# EAGLE board ESP-01 Miner (EAGLE 9.6.2)
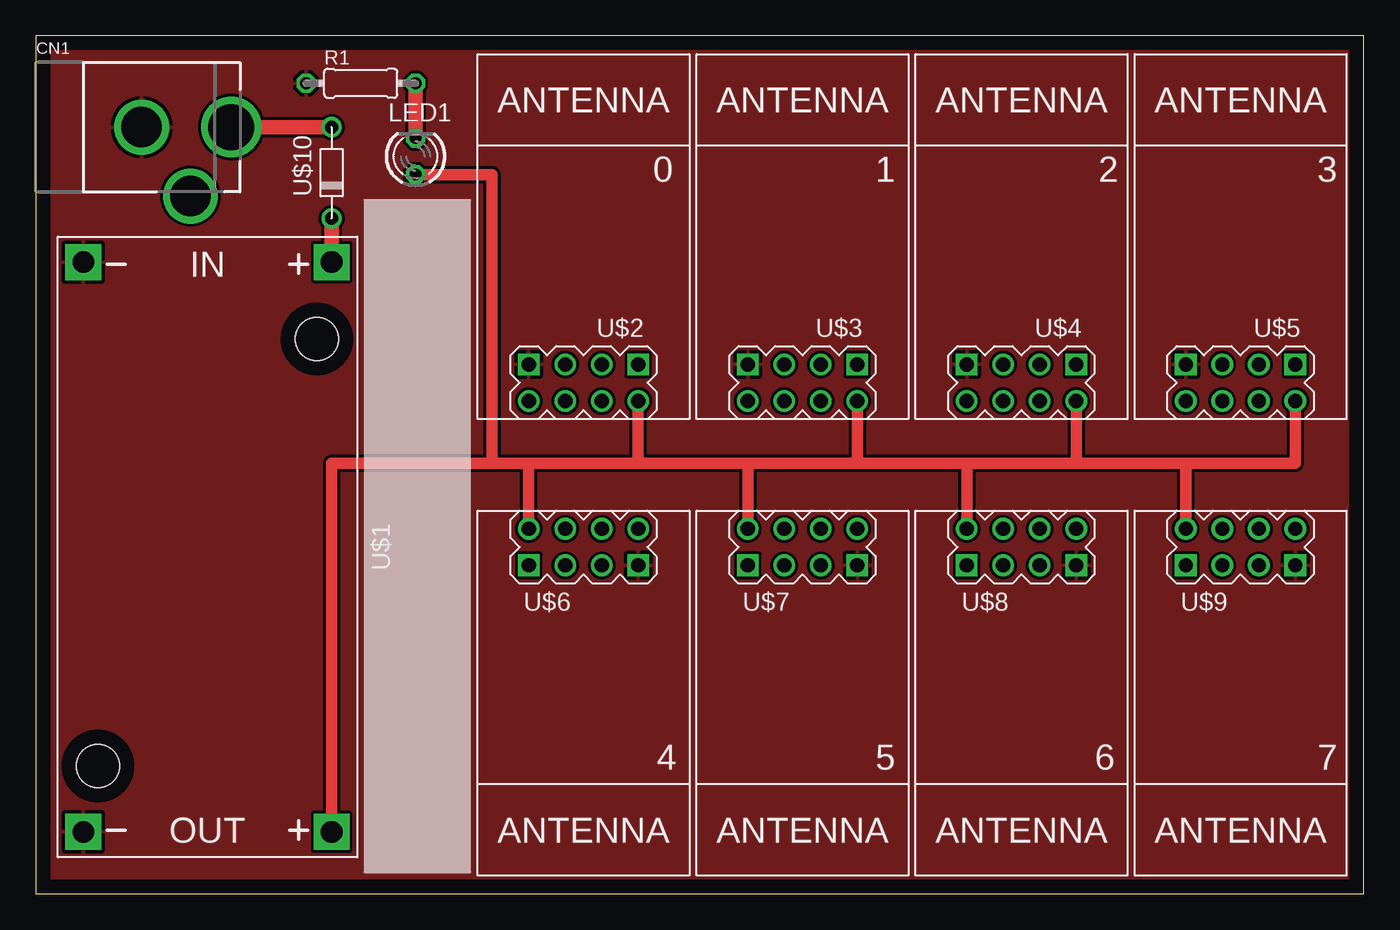
[diagram p0: board, top side]
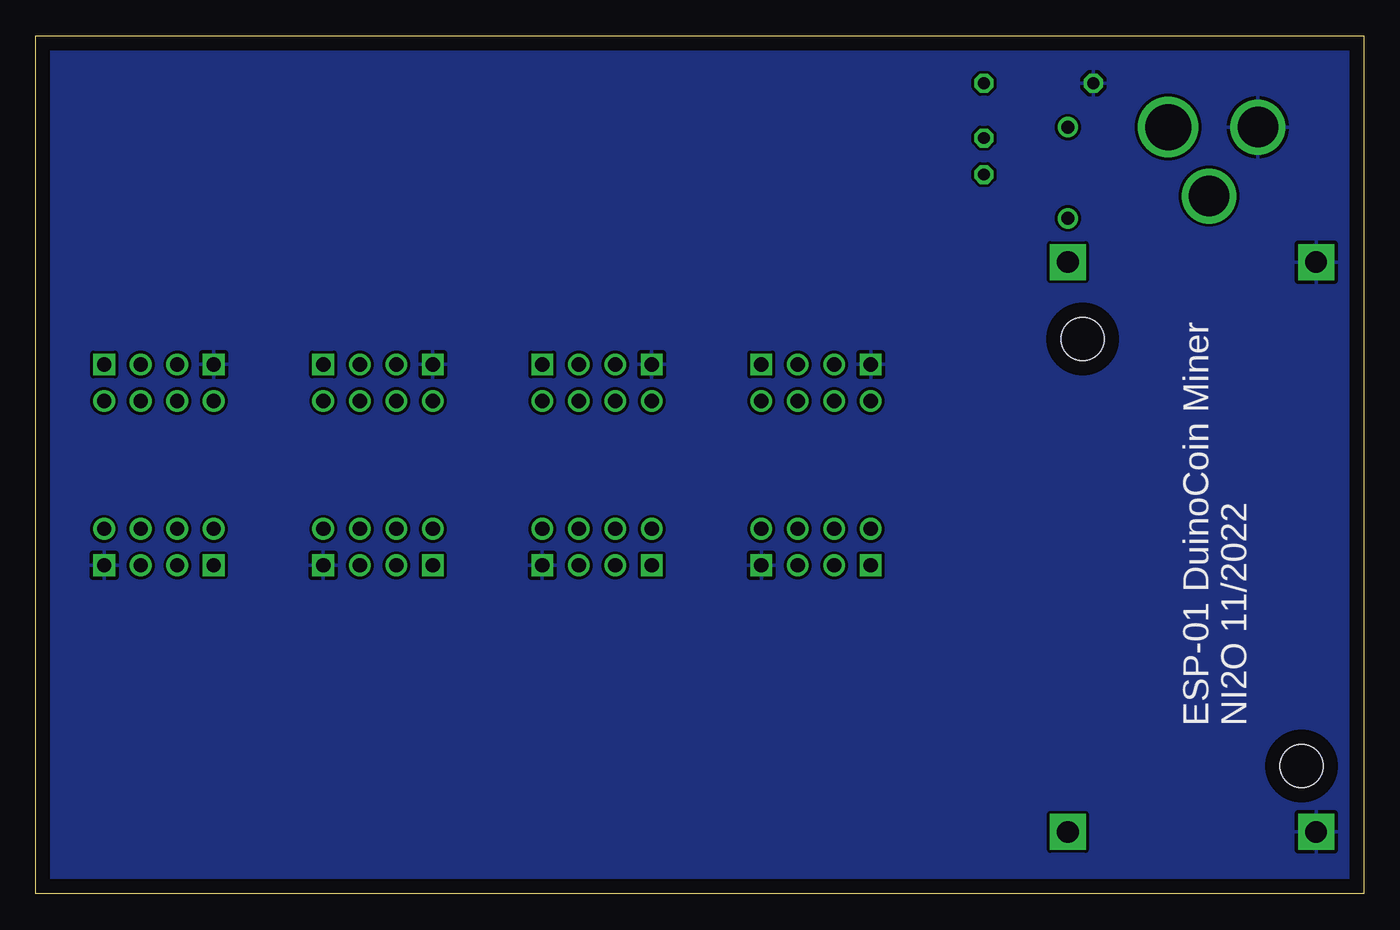
[diagram p1: board, bottom side, seen from below]

Size 92.38 x 59.68 mm. Coordinates in mm from the lower left corner, seen from the top.
Outline: 0,0 92.38,0 92.38,59.68 0,59.68 0,0
Copper layers (1*16): Top 0.035mm / dielectric 1.5mm / Bottom 0.035mm
Design rules "default": minimum track width 10mil, minimum drill 24mil, track to track 8mil, track to pad 8mil, pad to pad 8mil, via to via 8mil, smd to smd 8mil, copper to edge 40mil, drill to drill 8mil, minimum pad ring 10mil, minimum via ring 8mil, stop-mask expansion 4mil, vias tented up to drill 0mil, thermal gap 10mil

## Footprints (pad centres in the part's own frame; a part is rotated, then mirrored left to right if it is on the bottom)
DCJACK_2MM_PTH = drill 2.8: GND 0,7.35; GNDBREAK 4.8,10.75 | drill 3.2: PWR 0,13.6
LED3MM = drill 0.813 octagon: A -1.27,0; K 1.27,0
0204/7 = drill 0.813 octagon: 1 -3.81,0; 2 3.81,0
DC-DC-STEP-DOWN-LM2596 = drill 1.5 pad 2.5 square: IN+ -19.812,8.636; IN- -19.812,-8.636; OUT+ 19.812,8.636; OUT- 19.812,-8.636 | hole 3: -14.478,7.62; 15.24,-7.62
WIRELESS-WIFI-ESP-01 = drill 1 square: A1 -8.89,3.81; D1 -8.89,-3.81 | drill 1: A2 -11.43,3.81; B1 -8.89,1.27; B2 -11.43,1.27; C1 -8.89,-1.27; C2 -11.43,-1.27; D2 -11.43,-3.81
DIODE-12.70 = drill 0.9: P$1 -3.81,0; P$2 2.54,0

## Placement (x,y rotation side)
CN1  [DCJACK_2MM_PTH]  0,53.34 270 top
LED1  [LED3MM]  26.42,51.31 90 top
R1  1K  [0204/7]  22.61,56.39 0 top
U$1  DC-DC-STEP-DOWN-LM2596  [DC-DC-STEP-DOWN-LM2596]  11.94,24.13 270 top
U$2  WIRELESS-WIFI-ESP-01  [WIRELESS-WIFI-ESP-01]  38.1,45.72 90 top
U$3  WIRELESS-WIFI-ESP-01  [WIRELESS-WIFI-ESP-01]  53.34,45.72 90 top
U$4  WIRELESS-WIFI-ESP-01  [WIRELESS-WIFI-ESP-01]  68.58,45.72 90 top
U$5  WIRELESS-WIFI-ESP-01  [WIRELESS-WIFI-ESP-01]  83.82,45.72 90 top
U$6  WIRELESS-WIFI-ESP-01  [WIRELESS-WIFI-ESP-01]  38.1,13.97 270 top
U$7  WIRELESS-WIFI-ESP-01  [WIRELESS-WIFI-ESP-01]  53.34,13.97 270 top
U$8  WIRELESS-WIFI-ESP-01  [WIRELESS-WIFI-ESP-01]  68.58,13.97 270 top
U$9  WIRELESS-WIFI-ESP-01  [WIRELESS-WIFI-ESP-01]  83.82,13.97 270 top
U$10  1N4001  [DIODE-12.70]  20.57,49.53 270 top

## Library data of the parts
CN1 = microbuilder
LED1 = led
R1 = rcl
U$1-U$9 = diy-modules
U$10 = Oles komponentbibliotek

## Nets
+3V3: LED1.A U$1.OUT+ U$2.D2 U$3.D2 U$4.D2 U$5.D2 U$6.D2 U$7.D2 U$8.D2 U$9.D2
+12V: CN1.PWR U$10.P$1
GND: CN1.GND R1.1 U$1.IN- U$1.OUT- U$2.A1 U$3.A1 U$4.A1 U$5.A1 U$6.A1 U$7.A1 U$8.A1 U$9.A1
GNDBREAK: CN1.GNDBREAK
N$1: U$1.IN+ U$10.P$2
N$3: LED1.K R1.2

## Tracks (layer width: path | path; a pad name or v marks a point on that pad's centre or on a via)
+3V3
  Top 0.813: U$6.D2 34.29,29.97 | 34.29,29.97 41.91,29.97 | 41.91,29.97 49.53,29.97 | 49.53,29.97 57.15,29.97 | 57.15,29.97 64.77,29.97 | 64.77,29.97 72.39,29.97 | 72.39,29.97 80.01,29.97 | 80.01,29.97 87.63,29.97 U$5.D2 | U$9.D2 80.01,29.97 | U$8.D2 64.77,29.97 | U$4.D2 72.39,29.97 | U$3.D2 57.15,29.97 | U$2.D2 41.91,29.97 | U$7.D2 49.53,29.97 | U$1.OUT+ 20.57,29.97 31.75,29.97 | 31.75,29.97 34.29,29.97 | LED1.A 31.75,50.04 31.75,29.97
+12V
  Top 1.016: CN1.PWR U$10.P$1
GND
  pour Top: 0,0 0,59.69 92.71,59.69 92.71,0
  pour Bottom: 0,0 0,59.69 92.71,59.69 92.71,0
N$1
  Top 1.016: U$10.P$2 U$1.IN+
N$3
  Top 1.016: R1.2 LED1.K

## Text on the board
tNames: 0 | 1 | 2 | 3 | 4 | 5 | 6 | 7
bNames: ESP-01 DuinoCoin Miner / NI2O 11/2022